# Altium PCB 400797.PcbDoc (part 6 of 8)
Units mm, origin at the board's own origin, x right, y up, seen from the top; angles counter-clockwise.
Board outline 155 x 63.5 mm, 4 copper layers (Top Layer, Mid-Layer 1, Mid-Layer 2, Bottom Layer), stack 1.514 mm thick; 333 components, 292 nets, 1555 pads, 2205 vias.
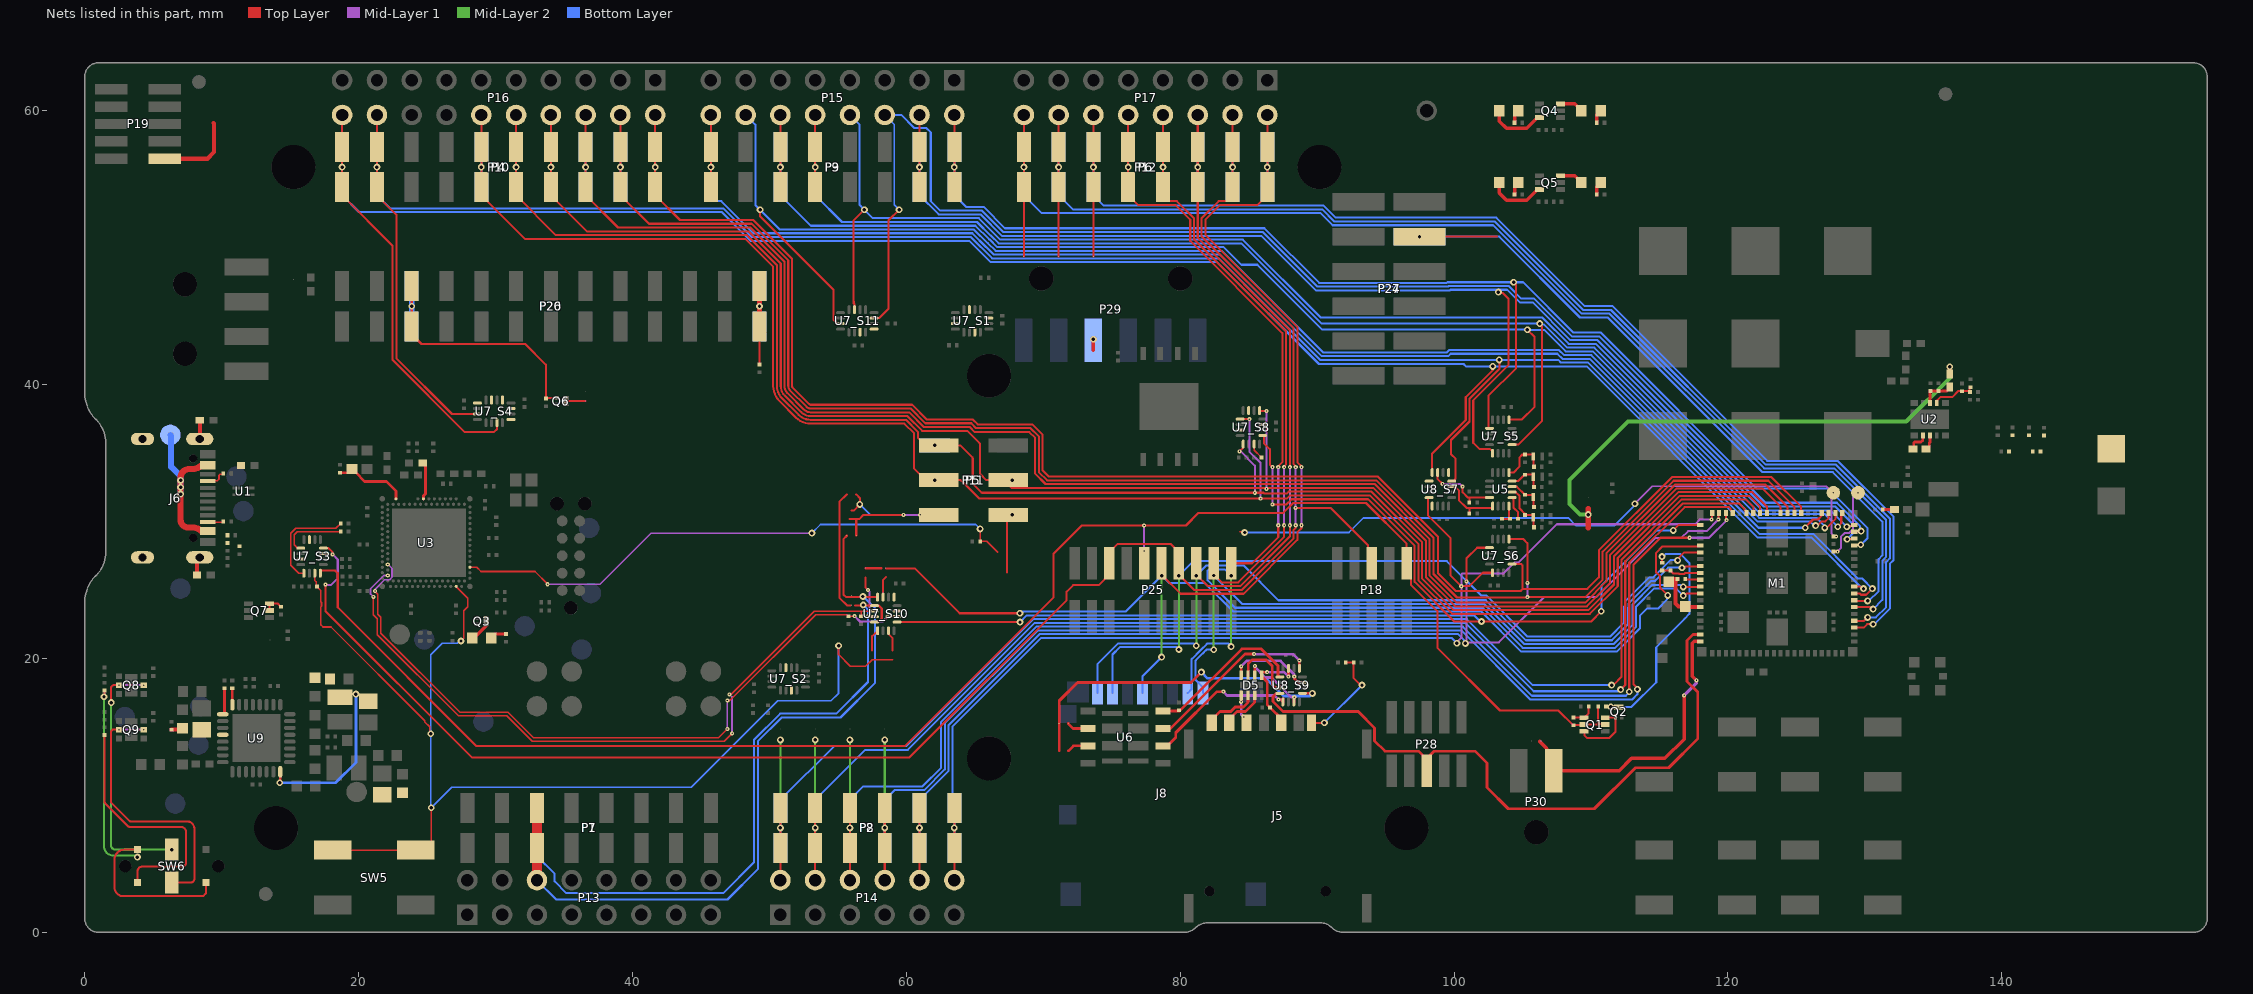
[diagram p6: the nets of this part, all layers, seen from the top]

## Via types
v1: diameter 0.5, hole 0.25, Top Layer to Bottom Layer, tented both sides, 1614 vias
v2: diameter 0.3, hole 0.1, Top Layer to Mid-Layer 1, tented top, 485 vias
v3: diameter 0.3, hole 0.1, Top Layer to Mid-Layer 1, tented both sides, 97 vias
v4: diameter 0.61, hole 0.305, Top Layer to Bottom Layer, tented both sides, 9 vias

## Nets (pads, with @x,y where several pads share a name; then routed paths per layer and width w, separated by ;. In a path a pad name is that pad's centre, name@x,y a point inside that pad or via, vN(x,y) a via of type N, cw(c..) or ccw(c..) an arc to the next point about the centre after c; other vN are vias at no path point) (continued)
NC.CH1_S9: C49.2 U6.8 U8_S9.1 | length 11.7
  Top Layer w0.2: U6.8@78.75,16.155 79.955,16.155 84.5,20.7 85.915,20.7 87.146,19.469 87.146,18.779 U8_S9.1@87.275,18.65
NC.CH2_S4: U7_S4.5
NC.CH2_S7: U8_S7.5
NC.CH2_S9: U6.6 U8_S9.5 | length 11.1
  Top Layer w0.2: U6.6@78.75,13.615 79.05,13.615 79.675,14.24 79.675,14.575 82.675,17.575 v2(83.15,17.575) ; v2(87.175,17) 87.325,17 U8_S9.5@87.5,16.825 U8_S9.5@87.5,17.05
  Mid-Layer 1 w0.2: v2(83.15,17.575) 83.425,17.3 86.875,17.3 v2(87.175,17)
NC.CH2_S10: SB21.1 U7_S10.5 | length 1.6
  Top Layer w0.15: SB21.1@57.5,20.588 SB21.1@57.5,20.6 57.5,21.625 U7_S10.5@57.9,22.025
NC.CH3_S3: R20.2 U7_S3.9 | length 4.8
  Top Layer w0.125: U7_S3.9@15.775,28.05 15.55,28.05 15.3,28.3 15.3,29.044 15.515,29.259 R20.2@18.69,29.259
NC.CH3_S4: U7_S4.9
NC.CH3_S7: U8_S7.9
NC.CH3_S9: SB13.2 SB14.2 U8_S9.9 | length 24.5
  Top Layer w0.2: SB14.2@71.162,13.25 71.162,16.912 72.5,18.25 80.8,18.25 v1(81.55,19) ; U8_S9.9@88.925,17.45 v1(89.65,17.45)
  Bottom Layer w0.2: v1(81.55,19) 82,18.55 86.25,18.55 87.55,17.25 89.45,17.25 v1(89.65,17.45)
NC.CH4_S3: R19.2 U7_S3.13 | length 7.5
  Top Layer w0.125: U7_S3.13@16,26.225 15.625,26.225 15.05,26.8 15.05,29.147 15.412,29.509 18.34,29.509 R19.2@18.69,29.859
NC.CH4_S4: U7_S4.13
NC.CH4_S7: U8_S7.13
NC.CH4_S9: U6.7 U8_S9.13 | length 13
  Top Layer w0.2: U6.7@78.75,14.885 79.285,14.885 84.725,20.325 v2(85.4,20.325) ; U8_S9.13@88.7,19.275 v2(88.7,19.85)
  Mid-Layer 1 w0.2: v2(85.4,20.325) 85.415,20.31 88.24,20.31 v2(88.7,19.85)
NC.CH4_S10: U7_S10.13
NC.CH4_S11: U7_S11.13
NetA1_1: A1.1 C20.2 L2.2
NetC7_1: C7.1 FB1.2 M1.14 R1.1 | length 4.5
  Top Layer w0.3: C7.1@115.675,25.6 115.875,25.8 R1.1@116.315,25.8 116.175,25.66 116.175,24.025 116.4,23.8 FB1.2@116.875,23.8 116.925,23.75 M1.14@117.975,23.75
NetC8_2: C8.2 C9.2 C50.2 FB2.1 J6.A4 J6.A9 TP17.1 U1.1 | length 12.5
  Top Layer w0.45: J6.A9@8.985,29.3 8.489,29.3 ccw(c7.915,28.81) 7.896,29.565 7.535,29.565 cw(c7.535,30.1) 7,30.1 v1(7,32) v1(7,32.5) v1(7,33) 7,33.2 cw(c7.635,33.2) 7.635,33.835 7.896,33.835 ccw(c7.915,34.59) 8.489,34.1 J6.A4@8.985,34.1
  Bottom Layer w0.45: TP17.1@6.248,36.324 6.3,36.272 6.3,34 7,33.3 v1(7,33) v1(7,32.5) v1(7,32)
NetC10_1: C10.1 M1.9 R2.2 | length 2.9
  Top Layer w0.15: R2.2@115.125,26.475 115.14,26.475 R2.2@115.2,26.415 C10.1@115.8,26.415 ; C10.1@115.875,26.34 116.015,26.2 116.411,26.2 116.434,26.177 116.83,26.177 116.903,26.25 M1.9@117.975,26.25
NetC14_2: C14.2 C15.2 FB3.1 U2.3 | length 2.5
  Top Layer w0.2: U2.3@134.747,38.653 C14.2@134.747,39.534 ; C14.2@134.797,39.534 C14.2@134.8,39.537 C15.2@135.375,39.537 135.987,39.537 136.2,39.75 FB3.1@136.2,39.825 FB3.1@136.2,39.9
NetC16_2: C16.2 C17.2 R6.2 U2.2 | length 3.1
  Top Layer w0.15: U2.2@135.247,38.653 135.247,38.819 135.513,39.085 136.385,39.085 136.837,39.537 137.595,39.537 137.625,39.567 137.625,39.755 137.685,39.815 C16.2@137.7,39.815
NetC19_2: C19.2 L4.2 | length 0.8
  Top Layer w0.203: C19.2@131.315,30.88 L4.2@132.155,30.88
NetC20_1: C20.1 C22.2 C23.2 L1.2
NetC36_2: C36.2 U3.A15 | length 2.7
  Top Layer w0.225: C36.2@24.675,34.264 24.875,34.064 24.875,32.009 24.725,31.859 U3.A15@24.725,31.659
NetC37_1: C37.1 R21.2 U3.A5 | length 5.3
  Top Layer w0.15: U3.A5@22.725,31.659 U3.A5@22.75,31.684
  Top Layer w0.18: U3.A5@22.745,31.684 22.745,31.774
  Top Layer w0.2: R21.2@18.625,33.565 19.794,33.565 20.434,32.925 22.026,32.925 22.725,32.225 U3.A5@22.725,31.659
NetC44_1: C44.1 D1.3 R53.1 U5.2 | length 3.6
  Top Layer w0.15: U5.2@104.235,32.15 104.516,32.15 104.78,31.887 104.78,30.963 105.174,30.568 C44.1@105.174,30.476 D1.3@105.784,30.476 ; D1.3@105.789,30.318 105.789,29.621 R53.1@105.829,29.581
NetC45_2: C45.2 D2.3 R55.1 U5.3 | length 2.6
  Top Layer w0.15: U5.3@104.235,32.55 104.581,32.55 C45.2@105.182,31.949 ; C45.2@105.174,31.949 C45.2@105.182,31.949 ; D2.3@105.784,31.949 C45.2@105.182,31.949 ; D2.3@105.789,31.791 105.789,31.095 R55.1@105.829,31.055
NetC46_2: C46.2 D3.3 R57.1 U5.4 | length 2.5
  Top Layer w0.15: U5.4@104.235,32.95 104.67,32.95 105.142,33.422 C46.2@105.174,33.422 D3.3@105.784,33.422 ; D3.3@105.789,33.264 105.789,32.568 R57.1@105.829,32.528
NetC47_2: C47.2 D4.3 R61.1 U5.5 | length 3.5
  Top Layer w0.15: U5.5@104.01,33.575 104.34,33.575 104.771,34.006 104.771,34.669 104.997,34.896 C47.2@105.174,34.896 D4.3@105.784,34.896 ; D4.3@105.789,34.738 105.789,34.041 R61.1@105.829,34.001
NetC57_2: C57.2 C67.2 FB4.1 U9.20 | length 0.9
  Top Layer w0.3: C67.2@6.327,14.797 7.027,14.797 ccw(c7.027,14.897) C57.2@7.127,14.897
NetC59_2: C59.2 C71.2 FB6.1 L8.1 U9.32 | length 12
  Top Layer w0.2: v1(14.234,10.924) 14.275,10.965 U9.32@14.275,11.725
  Bottom Layer w0.2: v1(14.234,10.924) 18.324,10.924 19.8,12.4 v1(19.8,17.4)
NetC61_1: C61.1 C63.1 J6.SHLD | length 2.7
  Top Layer w0.3: C63.1@8.2,26.1 8.2,27.185 J6.SHLD@8.395,27.38 ; J6.SHLD@8.395,36.03 8.4,36.035 C61.1@8.4,37.4
NetC70_2: C70.2 FB5.2 SB33.1
NetD5_1: D5.1 J5.C2 | length 1.7
  Top Layer w0.2: v2(84.45,16.825) D5.1@84.45,17.325
  Mid-Layer 1 w0.2: v2(84.45,16.825) 84.45,15.925 v2(84.65,15.725)
NetD5_2: D5.2 J5.C3 | length 3.9
  Top Layer w0.2: J5.C3@82.3,15.3 82.3,15.525 82.9,16.125 83.69,16.125 84.015,16.45 84.619,16.45 84.95,16.781 D5.2@84.95,17.325
NetD5_3: D5.3 J5.C7 | length 3.2
  Top Layer w0.2: J5.C7@83.57,15.3 83.57,15.545 84.15,16.125 84.753,16.125 85.45,16.822 D5.3@85.45,17.325
NetFB3_2: FB3.2 SB1.2 SB2.2 | length 37.1
  Top Layer w0.3: FB3.2@136.2,40.775 v1(136.2,41.3)
  Top Layer w0.4: SB1.2@109.8,29.55 v1(109.8,30.5) 109.8,30.95
  Mid-Layer 2 w0.3: v1(109.8,30.5) 109.2,30.5 108.425,31.275 108.425,33.025 112.7,37.3 133.02,37.3 136.2,40.48 v1(136.2,41.3)
NetJ5_CD: J5.CD R62.2 R63.2 | length 7.4
  Top Layer w0.15: J5.CD@89.6,15.3 v1(90.525,15.3) ; R63.2@92.085,19.7 R62.2@92.665,19.7 92.665,18.56 93.175,18.05 v1(93.275,18.05)
  Bottom Layer w0.15: v1(90.525,15.3) v1(93.275,18.05)
NetJ6_A5: J6.A5 R71.2 | length 1.5
  Top Layer w0.125: J6.A5@8.985,32.955 8.999,32.969 9.669,32.969 9.8,33.1 9.8,33.368 9.873,33.442 10.057,33.442 R71.2@10.115,33.5
NetJ6_B5: J6.B5 R70.2 | length 1.1
  Top Layer w0.125: J6.B5@8.985,29.955 10.07,29.955 R70.2@10.115,30
NetL6_1: L6.1 U2.8 | length 1.1
  Top Layer w0.2: L6.1@134.475,35.3 134.55,35.3 134.7,35.45 134.7,35.718 134.747,35.765 U2.8@134.747,36.278
NetL6_2: L6.2 U2.7 | length 1.5
  Top Layer w0.2: L6.2@133.525,35.3 133.575,35.35 133.575,35.733 133.642,35.8 134.1,35.8 134.225,35.925 134.225,36.256 U2.7@134.247,36.278
NetLED1_1: LED1.1 Q4.6 | length 4.1
  Top Layer w0.254: LED1.1@103.301,60 103.301,59.242 103.827,58.716 105.304,58.716 Q4.6@106.039,59.452 ; Q4.6@106.202,59.452 Q4.6@106.25,59.5
NetLED1_2: LED1.2 R39.1 | length 1
  Top Layer w0.254: R39.1@104.414,59.118 104.414,59.69 LED1.2@104.698,59.975
NetLED2_1: LED2.1 Q4.3 | length 1.8
  Top Layer w0.254: Q4.3@107.75,60.5 Q4.3@107.775,60.5 108.801,60.5 109.022,60.279 109.047,60.279 109.301,60.025 LED2.1@109.301,60
NetLED2_2: LED2.2 R40.1 | length 1
  Top Layer w0.254: R40.1@110.414,59.118 110.414,59.69 110.698,59.975 LED2.2@110.698,60
NetLED3_1: LED3.1 Q5.6 | length 4.1
  Top Layer w0.254: LED3.1@103.302,54.75 103.302,53.992 103.827,53.466 105.304,53.466 Q5.6@106.039,54.202 ; Q5.6@106.202,54.202 Q5.6@106.25,54.25
NetLED3_2: LED3.2 R41.1 | length 1
  Top Layer w0.254: R41.1@104.414,53.868 104.414,54.44 104.699,54.725 LED3.2@104.699,54.75
NetLED4_1: LED4.1 Q5.3 | length 1.4
  Top Layer w0.254: Q5.3@107.75,55.25 Q5.3@107.775,55.25 108.801,55.25 LED4.1@109.022,55.029
NetLED4_2: LED4.2 R42.1 | length 1
  Top Layer w0.254: R42.1@110.414,53.868 110.414,54.44 110.698,54.725 LED4.2@110.698,54.75
NetLED5_1: LED5.1 Q3.3 | length 1.7
  Top Layer w0.25: LED5.1@28.302,21.5 28.45,21.5 29.325,22.375 Q3.3@29.325,22.725
NetLED5_2: LED5.2 R33.1 | length 1.2
  Top Layer w0.25: LED5.2@29.699,21.5 29.983,21.785 R33.1@30.75,21.785
NetM1_10: M1.10 R1.2 | length 1.1
  Top Layer w0.15: R1.2@116.885,25.8 116.935,25.75 M1.10@117.975,25.75
NetM1_99: M1.99 TP1.1 | length 5.4
  Top Layer w0.15: M1.99@127.7,27.8 v3(128,27.8)
  Mid-Layer 1 w0.15: v3(128,27.8) 128.25,28.05 128.25,28.886 128.521,29.158 128.863,29.158 129.135,29.429 129.135,31.735 v3(129.5,32.1)
NetM1_101: M1.101 SB11.2 TP2.1 | length 49.2
  Top Layer w0.125: SB11.2@84.35,29.25 84.539,29.25 84.556,29.233 84.667,29.233 v1(84.7,29.2)
  Top Layer w0.15: M1.101@127.7,28.9 127.703,28.903 127.898,28.903 v3(127.901,28.905)
  Mid-Layer 1 w0.125: v1(113.2,31.3) 114.477,32.577 127.176,32.577 127.653,32.1 v3(127.7,32.1)
  Mid-Layer 1 w0.15: v3(127.7,32.1) 127.7,32.087 127.55,31.937 127.55,29.15 127.785,28.915 127.891,28.915 v3(127.901,28.905)
  Bottom Layer w0.125: v1(84.7,29.2) 92.319,29.2 93.381,30.263 108.337,30.263 108.9,29.7 111.7,29.7 113.2,31.2 v1(113.2,31.3)
NetP5_6: P5.6 P11.6 SB18.1 SB19.2 | length 4
  Top Layer w0.152: 67.338,26.275 P5.6@67.338,30.263
  other v1: 67.722,30.481
NetP19_1: P19.1 SB15.1 SB16.1 | length 5.9
  Top Layer w0.3: P19.1@5.836,56.491 8.95,56.491 9.438,56.978 9.438,57.603 9.438,59.057 SB16.1@9.4,59.095
NetP20_3: P20.3 P26.3 Q6.1 R67.1 | length 20.9
  Top Layer w0.15: P20.3@23.876,47.753 P20.3@23.876,47.186 v1(23.876,45.721) P20.3@23.876,44.256 23.876,43.674 24.589,42.961 32.164,42.961 33.675,41.45 R67.1@33.675,39.025 ; R67.1@33.675,38.985 R67.1@33.675,39.025 ; Q6.1@34.425,39.025 R67.1@33.675,39.025
  Bottom Layer w0.381: P26.3@23.876,44.256 v1(23.876,45.721) P26.3@23.876,47.186
NetP20_13: P20.13 P26.13 R68.2 | length 9.3
  Top Layer w0.152: R68.2@49.276,41.46 P20.13@49.276,44.256 49.276,44.204 P20.13@49.71,43.77
  Top Layer w0.381: P20.13@49.276,44.256 v1(49.276,45.721) P20.13@49.276,47.186
  Bottom Layer w0.381: P26.13@49.276,44.256 v1(49.276,45.721) P26.13@49.276,47.186
NetP29_3: P29.3 SB20.2 | length 0.8
  Top Layer w0.254: 73.66,42.517 SB20.2@73.66,42.555 v1(73.66,43.31)
NetQ1_3: Q1.3 Q1.6 Q2.1 | length 4.7
  Top Layer w0.15: Q1.6@109.49,14.675 109.537,14.628 109.537,14.363 109.7,14.2 111.348,14.2 111.79,14.642 Q2.1@111.79,15.725 ; Q1.3@111.04,15.675 111.74,15.675 Q2.1@111.79,15.725 ; Q2.1@111.79,15.75 Q2.1@111.79,15.725
NetQ1_4: Q1.4 R8.2 R10.2 | length 1.7
  Top Layer w0.15: R10.2@108.715,15.685 109.5,15.685 109.825,16.01 R8.2@109.825,16.5
NetQ6_3: Q6.3 SB17.1 | length 1.5
  Top Layer w0.15: Q6.3@35.125,38.8 35.135,38.81 SB17.1@36.576,38.81
NetQ7_5: Q7.5 Q7.6 R75.2 | length 1.4
  Top Layer w0.15: Q7.5@13.5,23.5 Q7.6@13.5,24 14.11,24 R75.2@14.325,23.785
NetQ8_2: Q8.2 Q8.5 SW6.5 | length 18.6
  Top Layer w0.15: v1(1.936,16.778) 1.9,16.814 1.9,17.8 cw(c2.15,17.8) 2.15,18.05 v2(2.495,18.05)
  Mid-Layer 1 w0.15: v2(2.495,18.05) v2(4.305,18.05)
  Mid-Layer 2 w0.15: v1(1.936,16.778) 1.9,16.743 1.9,6.389 ccw(c2.254,6.389) 2.254,6.035 v1(6.35,6.035)
NetQ9_2: Q9.2 Q9.5 SW6.2 | length 20.1
  Top Layer w0.15: v2(2.495,14.8) 2.1,14.8 ccw(c2.1,14.6) 1.9,14.6 1.9,9.562 ccw(c2.05,9.562) 1.944,9.456 3.256,8.144 ccw(c3.362,8.25) 3.362,8.1 7.46,8.1 cw(c7.46,7.56) 8,7.56 8,3.9 cw(c7.735,3.9) 7.735,3.635 SW6.2@6.35,3.635
  Mid-Layer 1 w0.15: v2(2.495,14.8) v2(4.305,14.8)
NetR36_1: R36.1 U9.17 | length 2
  Top Layer w0.2: U9.17@10.075,15.925 ccw(c10.075,16.05) 10.2,16.05 R36.1@10.2,17.815
NetR37_1: R37.1 U9.16 | length 1.2
  Top Layer w0.2: R37.1@10.769,17.822 10.769,16.625 U9.16@10.775,16.625
NetR51_1: R51.1 U5.1 | length 1.7
  Top Layer w0.15: U5.1@104.235,31.75 104.34,31.645 104.34,31.014 104.68,30.674 R51.1@104.68,30.197
NetR58_1: R58.1 R59.2 U5.16 | length 1.5
  Top Layer w0.15: R59.2@103.511,30.197 R58.1@104.095,30.197 104.01,30.282 U5.16@104.01,31.125
NetR77_2: R77.2 SW6.3 SW6.4 | length 26.3
  Top Layer w0.15: v1(1.4,17.2) 1.425,17.225 1.425,17.64 R77.2@1.45,17.665 ; SW6.4@3.85,6.035 2.901,6.035 ccw(c2.901,5.309) 2.175,5.309 2.175,3.279 ccw(c2.819,3.279) 2.819,2.635 8.573,2.635 ccw(c8.573,2.785) 8.679,2.679 8.806,2.806 ccw(c8.7,2.912) 8.85,2.912 SW6.3@8.85,3.635
  Mid-Layer 2 w0.15: v1(1.4,17.2) 1.4,6.3 ccw(c2.1,6.3) 2.1,5.6 3.735,5.6 cw(c3.735,5.495) v1(3.84,5.495)
NetR79_1: R79.1 SW6.1 | length 18.8
  Top Layer w0.15: R79.1@1.45,14.415 1.45,9.512 ccw(c1.6,9.512) 1.494,9.406 3.156,7.744 ccw(c3.262,7.85) 3.262,7.7 7.011,7.7 cw(c7.011,7.311) 7.4,7.311 7.4,5.1 cw(c7.1,5.1) 7.1,4.8 4.2,4.8 ccw(c4.2,4.45) 3.85,4.45 SW6.1@3.85,3.635
NetSB13_1: SB13.1 U6.2 | length 1.6
  Top Layer w0.2: 71.812,15.25 72.177,14.885 U6.2@73.25,14.885
NetSB14_1: SB14.1 U6.3 | length 1.6
  Top Layer w0.2: SB14.1@71.838,13.25 72.203,13.615 U6.3@73.25,13.615
NO.CH1_S1: U7_S1.15
NO.CH1_S8: R35.1 U7_S8.15 | length 1.2
  Top Layer w0.125: U7_S8.15@85.4,35.65 85.4,35.209 R35.1@85.938,34.671
NO.CH1_S9: C48.1 D5.5 J5.C1 U8_S9.15 | length 6.8
  Top Layer w0.2: D5.5@85.95,18.775 85.95,18.7 86.35,18.3 86.35,16.635 C48.1@86.56,16.425 87.38,15.605 J5.C1@87.38,15.3 ; D5.5@85.95,19 v2(86.35,19) ; v2(87.9,18.675) U8_S9.15@87.9,19.275
  Mid-Layer 1 w0.2: v2(86.35,19) 87.575,19 v2(87.9,18.675)
NO.CH1_S10: SB22.2 U7_S10.15 | length 1.5
  Top Layer w0.15: U7_S10.15@58.3,24.475 58.3,25.738 58.5,25.938
NO.CH2_S1: U7_S1.3
NO.CH2_S2: U7_S2.3
NO.CH2_S3: U7_S3.3
NO.CH2_S8: U7_S8.3
NO.CH2_S9: D5.7 U8_S9.3 | length 4.9
  Top Layer w0.2: D5.7@84.95,18.775 84.975,18.8 84.975,19.625 85.25,19.9 86.255,19.9 86.725,19.43 86.725,18.111 86.986,17.85 U8_S9.3@87.275,17.85
NO.CH2_S10: SB23.2 U7_S10.3 | length 3.6
  Top Layer w0.15: SB23.2@57,25.912 SB23.2@57,25.9 57,25.2 v2(57.2,25) ; v2(57.15,23.05) U7_S10.3@57.675,23.05
  Mid-Layer 1 w0.15: v2(57.15,23.05) 57.3,23.2 57.3,24.9 v2(57.2,25)
NO.CH3_S1: U7_S1.7
NO.CH3_S3: U7_S3.7
NO.CH3_S4: U7_S4.7
NO.CH3_S8: U7_S8.7
NO.CH3_S9: D5.6 U8_S9.7 | length 4.9
  Top Layer w0.2: D5.6@85.45,18.775 v2(85.45,19.45) ; U8_S9.7@88.3,16.825 88.3,17.15 v2(88.325,17.175)
  Mid-Layer 1 w0.2: v2(85.45,19.45) 85.45,19.37 86.204,18.616 86.659,18.616 88.1,17.175 v2(88.325,17.175)
NO.CH3_S10: SB24.1 U7_S10.7 | length 1.6
  Top Layer w0.15: U7_S10.7@58.7,22.025 58.7,21.772 59,21.472 SB24.1@59,20.6 SB24.1@59,20.588
NO.CH4_S1: U7_S1.11
NO.CH4_S2: U7_S2.11
NO.CH4_S3: U7_S3.11
NO.CH4_S4: U7_S4.11
NO.CH4_S8: U7_S8.11
NO.CH4_S9: D5.8 U8_S9.11 | length 6.1
  Top Layer w0.2: D5.8@84.45,18.775 v2(84.45,19.425) ; v2(88.325,18.675) 88.325,18.55 88.625,18.25 U8_S9.11@88.925,18.25
  Mid-Layer 1 w0.2: v2(84.45,19.425) 84.85,19.825 87.315,19.825 88.325,18.815 v2(88.325,18.675)
NO.CH4_S10: U7_S10.11
NO.CH4_S11: U7_S11.11
nRESET: Q2.3 R2.1 R9.2 | length 17.6
  Top Layer w0.15: R9.2@111.1,16.5 v1@111.398,16.5 ; v1(111.44,16.459) v1@111.398,16.5 ; Q2.3@112.015,16.45 111.965,16.5 v1@111.398,16.5 ; v1(115.181,27.438) 115.191,27.429 115.191,26.994 R2.1@115.2,26.985
  Bottom Layer w0.15: v1(111.44,16.459) 112.959,16.459 114.762,18.262 114.762,20.812 116.837,22.887 116.837,22.905 117.188,23.255 117.188,26.973 116.548,27.613 115.444,27.613 115.269,27.438 v1(115.181,27.438)
P0.00: M1.56 P3.1 P9.1 P15.2 U7_S5.1 | length 99.1
  Top Layer w0.15: P3.1@63.5,54.416 v1(63.5,55.881) P3.1@63.5,57.346 P15.2@63.5,59.691 ; U7_S5.1@102.585,36.809 102.5,36.894 102.5,39.172 104.535,41.207 104.535,47.29 v1(104.35,47.475) ; M1.56@129.225,28.25 129.375,28.275 129.604,28.275 ccw(c129.603,28.425) v1(129.694,28.306)
  Bottom Layer w0.15: P9.1@63.5,57.346 v1(63.5,55.881) P9.1@63.5,54.416 63.5,53.831 64.356,52.975 65.639,52.975 67.198,51.416 86.148,51.416 90.138,47.426 99.46,47.426 99.509,47.475 v1(104.35,47.475) 105.041,47.475 108.715,43.8 110.7,43.8 122.1,32.4 127.314,32.4 130.175,29.539 130.175,28.775 130.089,28.689 129.734,28.334 cw(c129.628,28.44) v1(129.694,28.306)
P0.01: M1.57 P3.2 P9.2 P15.4 U7_S5.5 | length 103.3
  Top Layer w0.15: P3.2@60.96,54.416 v1(60.96,55.881) P3.2@60.96,57.346 P15.4@60.96,59.691 ; U7_S5.5@102.81,34.984 102.81,35.099 102.61,35.299 101.851,35.299 101.4,35.75 101.4,38.85 103.985,41.435 103.985,46.249 103.545,46.689 103.296,46.689 v1(103.235,46.75) ; v1(128.7,28.7) 128.725,28.725 129.2,28.725 M1.57@129.225,28.75
  Bottom Layer w0.15: P9.2@60.96,57.346 v1(60.96,55.881) P9.2@60.96,54.416 60.96,53.831 62.366,52.425 65.411,52.425 66.97,50.866 85.92,50.866 89.91,46.876 99.688,46.876 99.737,46.925 v1@103.235,46.925 ; v1(103.235,46.75) v1@103.235,46.925 ; v1(128.7,28.7) 129.135,29.135 129.135,29.802 127.842,31.094 122.628,31.094 110.472,43.25 108.488,43.25 105.738,46 104.799,46 103.874,46.925 v1@103.235,46.925
P0.02: M1.58 P15.6 U7_S11.15 | length 103.8
  Top Layer w0.15: U7_S11.15@57.643,44.85 58,44.85 58.695,45.545 58.695,51.992 v1(59.473,52.77) ; M1.58@129.225,29.25 129.25,29.275 129.7,29.275 v1(129.725,29.3)
  Bottom Layer w0.125: P15.6@58.42,59.691 58.518,59.593 59.118,58.993 59.118,53.126 v1(59.473,52.77)
  Bottom Layer w0.15: P15.6@58.518,59.593 58.616,59.691 59.616,59.691 60.566,58.741 61.453,58.741 61.78,58.414 61.78,53.4 62.48,52.7 65.525,52.7 67.084,51.141 86.034,51.141 90.024,47.151 99.574,47.151 99.623,47.2 103.988,47.2 104.913,46.275 105.852,46.275 108.602,43.525 110.586,43.525 122.742,31.369 127.956,31.369 129.658,29.667 129.658,29.367 v1(129.725,29.3)
P0.03: M1.59 P15.8 U7_S11.3 | length 97
  Top Layer w0.15: U7_S11.3@56.218,45.475 56.218,45.875 56.156,45.938 56.156,46.051 56.155,51.992 v1(56.933,52.77) ; v1(128.685,29.615) 128.752,29.682 129.157,29.682 M1.59@129.225,29.75
  Bottom Layer w0.15: P15.8@55.88,59.691 56.59,58.981 56.59,53.114 v1(56.933,52.77) 57.554,52.15 65.297,52.15 66.856,50.591 84.573,50.591 90.278,44.886 100.072,44.886 100.086,44.9 106.449,44.9 108.374,42.975 110.358,42.975 122.514,30.819 127.481,30.819 v1(128.685,29.615)
P0.04: M1.61 P3.5 P9.5 P15.10 U7_S5.9 | length 104.7
  Top Layer w0.15: P3.5@53.34,54.416 P3.5@53.34,57.346 P15.10@53.34,59.691 ; U7_S5.9@104.235,35.609 104.693,35.609 106.429,37.344 106.429,44.274 v1(106.252,44.45) ; v1(128.015,29.615) 128.015,29.618 128.275,29.878 128.275,30.55 M1.61@128.35,30.625
  Bottom Layer w0.15: P9.5@53.34,57.346 v1(53.34,55.881) P9.5@53.34,54.416 53.34,53.831 55.296,51.875 65.158,51.875 66.158,50.875 66.183,50.875 66.742,50.316 84.459,50.316 90.325,44.45 v1(106.252,44.45) 106.319,44.383 106.577,44.383 108.26,42.7 110.245,42.7 122.4,30.544 127.086,30.544 v1(128.015,29.615)
P0.05: M1.62 P3.6 P9.6 P15.12 U7_S5.13 | length 104.8
  Top Layer w0.15: P3.6@50.8,54.416 P3.6@50.8,57.346 P15.12@50.8,59.691 ; U7_S5.13@104.01,37.434 104.92,37.434 105.879,38.393 105.879,43.471 v1(105.35,44) ; v1(127.071,29.536) 127.138,29.603 127.278,29.603 127.85,30.175 M1.62@127.85,30.625
  Bottom Layer w0.15: P9.6@50.8,57.346 v1(50.8,55.881) P9.6@50.8,54.416 50.8,53.831 53.031,51.6 65.044,51.6 66.044,50.6 66.069,50.6 66.628,50.041 83.173,50.041 84.464,48.75 85.636,48.75 90.37,44.016 105.334,44.016 v1(105.35,44) 106.571,44 108.146,42.425 110.131,42.425 122.286,30.269 126.467,30.269 127.004,29.732 127.004,29.603 v1(127.071,29.536)
P0.06: M1.63 P15.14 U7_S11.7 | length 106.6
  Top Layer w0.15: v1(49.313,52.77) 49.313,52.298 54.668,46.943 54.668,44.722 54.94,44.45 U7_S11.7@55.193,44.45 ; v1(126.4,29.7) 126.519,29.7 126.572,29.753 126.606,29.753 126.862,30.008 127.108,30.008 127.35,30.25 M1.63@127.35,30.625
  Bottom Layer w0.15: P15.14@48.26,59.691 48.97,58.981 48.97,53.114 v1(49.313,52.77) 50.759,51.325 64.93,51.325 65.93,50.325 65.955,50.325 66.514,49.766 83.034,49.766 90.454,42.346 99.46,42.346 99.639,42.525 107.657,42.525 108.032,42.15 110.017,42.15 122.172,29.994 126.023,29.994 126.317,29.7 v1(126.4,29.7)
P0.07: M1.64 P3.8 P9.8 P15.16 | length 100.7
  Top Layer w0.15: P3.8@45.72,54.416 P3.8@45.72,57.346 P15.16@45.72,59.691 ; v1(125.648,29.544) 125.648,29.584 126.214,30.15 126.573,30.15 126.85,30.427 M1.64@126.85,30.625
  Bottom Layer w0.15: P9.8@45.72,57.346 v1(45.72,55.881) P9.8@45.72,54.416 45.72,53.831 46.155,53.396 46.486,53.396 48.832,51.05 64.817,51.05 65.817,50.05 65.841,50.05 66.4,49.491 82.92,49.491 90.34,42.071 99.574,42.071 99.753,42.25 107.543,42.25 107.918,41.875 109.903,41.875 122.233,29.544 v1(125.648,29.544)
P0.08: M1.67 P4.1 P10.1 P16.2 U7_S6.1 | length 121.5
  Top Layer w0.15: P16.2@41.656,59.691 P4.1@41.656,57.346 v1(41.656,55.881) P4.1@41.656,54.416 41.656,53.831 43.468,52.019 48.814,52.019 51.65,49.183 51.65,39.887 ccw(c51.8,39.887) 51.694,39.781 52.906,38.569 ccw(c53.012,38.675) 53.012,38.525 60.425,38.525 61.5,37.45 64.85,37.45 65.2,37.1 69.181,37.1 69.95,36.331 69.95,33.725 70.389,33.286 94.423,33.286 98.825,28.884 98.825,26.225 100.125,24.925 104.851,24.925 105.005,25.079 ; U7_S6.1@104.235,26.884 104.909,26.884 104.997,26.796 104.997,25.088 105.005,25.079 ; M1.67@125.35,30.625 125.35,31.075 123.175,33.25 115.92,33.25 110.575,27.905 110.575,25.93 109.724,25.079 105.005,25.079
  Bottom Layer w0.15: P10.1@41.656,54.416 v1(41.656,55.881) P10.1@41.656,57.346
P0.09: M1.68 P4.2 P10.2 P16.4 U7_S6.5 | length 126.6
  Top Layer w0.15: P16.4@39.116,59.691 P4.2@39.116,57.346 v1(39.116,55.881) P4.2@39.116,54.416 39.116,53.831 41.203,51.744 48.7,51.744 51.375,49.07 51.375,39.887 ccw(c51.8,39.887) 51.498,39.588 52.713,38.373 ccw(c53.012,38.675) 53.012,38.25 60.311,38.25 61.386,37.175 64.736,37.175 65.086,36.825 69.067,36.825 69.675,36.217 69.675,33.611 70.275,33.011 94.309,33.011 98.495,28.825 98.495,26.166 100.211,24.45 105.287,24.45 105.312,24.475 v2(105.35,24.475) 109.584,24.475 110.85,25.741 110.85,27.791 116.034,32.975 122.95,32.975 124.85,31.075 M1.68@124.85,30.625 ; U7_S6.5@104.01,28.709 105.066,28.709 105.354,28.421 v2(105.354,25.521)
  Mid-Layer 1 w0.15: v2(105.35,24.475) 105.352,24.477 105.352,25.518 v2(105.354,25.521)
  Bottom Layer w0.15: P10.2@39.116,54.416 v1(39.116,55.881) P10.2@39.116,57.346
P0.10: M1.69 P4.3 P10.3 P16.6 | length 123.3
  Top Layer w0.15: P16.6@36.576,59.691 P4.3@36.576,57.346 v1(36.576,55.881) P4.3@36.576,54.416 36.576,53.831 38.938,51.469 48.586,51.469 51.1,48.956 51.1,39.887 ccw(c51.8,39.887) 51.302,39.395 52.52,38.178 ccw(c53.012,38.675) 53.012,37.975 60.197,37.975 61.272,36.9 64.622,36.9 64.997,36.525 68.978,36.525 69.4,36.103 69.4,33.497 70.161,32.736 94.196,32.736 98.22,28.712 98.22,26.052 100.197,24.075 109.573,24.075 111.125,25.627 111.125,27.677 116.148,32.7 122.725,32.7 124.35,31.075 M1.69@124.35,30.625
  Bottom Layer w0.15: P10.3@36.576,54.416 v1(36.576,55.881) P10.3@36.576,57.346
P0.11: M1.70 P4.4 P5.4 P10.4 P11.4 P16.8 U7_S8.5 | length 131.5
  Top Layer w0.15: P16.8@34.036,59.691 P4.4@34.036,57.346 v1(34.036,55.881) P4.4@34.036,54.416 34.036,53.824 36.665,51.194 39.881,51.194 39.882,51.193 40.483,51.193 40.485,51.194 48.473,51.194 50.825,48.842 50.825,39.887 ccw(c51.8,39.887) 51.108,39.2 52.325,37.983 ccw(c53.012,38.675) 53.012,37.7 60.083,37.7 61.158,36.625 64.45,36.625 65.331,35.744 cw(c65.225,35.638) 65.375,35.638 65.375,33.537 ccw(c65.525,33.537) 65.418,33.432 ; 65.419,33.431 65.829,33.021 P5.4@67.12,33.021 ; P5.4@67.437,33.021 P5.4@67.12,33.021 ; U7_S8.5@85.8,38.1 85.825,38.075 v2(86.3,38.075) ; v2(86.3,32.386) 86.269,32.417 ccw(c86.163,32.311) 86.163,32.461 67.679,32.461 P5.4@67.12,33.021 ; v2@86.416,32.461 94.082,32.461 97.945,28.598 97.945,25.938 100.083,23.8 109.687,23.8 111.4,25.513 111.4,27.563 116.262,32.425 122.5,32.425 123.85,31.075 M1.70@123.85,30.625
  Mid-Layer 1 w0.15: v2(86.3,32.386) v2(86.3,38.075)
  Bottom Layer w0.15: P10.4@34.036,54.416 v1(34.036,55.881) P10.4@34.036,57.346
  other v1: 67.722,33.021
P0.12: M1.72 P4.5 P5.1 P10.5 P11.1 P16.10 U7_S8.13 | length 130.9
  Top Layer w0.15: P16.10@31.496,59.691 P4.5@31.496,57.346 v1(31.496,55.881) P4.5@31.496,54.416 31.496,53.831 34.408,50.919 39.767,50.919 39.769,50.918 40.597,50.918 40.599,50.919 48.359,50.919 50.55,48.728 50.55,39.887 ccw(c51.8,39.887) 50.914,39.006 52.13,37.789 ccw(c53.012,38.675) 53.012,37.425 59.969,37.425 60.845,36.55 60.845,36.121 61.405,35.561 v1(62.072,35.561) P5.1@62.357,35.561 63.945,35.561 64.803,34.703 cw(c64.697,34.597) 64.847,34.597 64.847,33.672 64.847,32.815 ccw(c64.997,32.815) 64.89,32.71 65.456,32.144 ccw(c65.562,32.25) 65.562,32.1 v2(85.45,32.1) ; v2(84.325,35.125) 84.6,35.4 U7_S8.13@84.6,35.65 ; v2@85.47,32.08 85.491,32.1 86.091,32.1 86.155,32.036 87.761,32.036 87.911,32.186 93.968,32.186 97.67,28.484 97.67,25.824 99.969,23.525 109.801,23.525 111.675,25.399 111.675,27.449 116.376,32.15 119.538,32.15 120.538,32.15 120.541,32.148 121.777,32.148 122.85,31.075 M1.72@122.85,30.625
  Mid-Layer 1 w0.15: v2(84.325,35.125) 84.411,35.125 85.45,34.086 v2(85.45,32.1)
  Bottom Layer w0.15: P10.5@31.496,54.416 v1(31.496,55.881) P10.5@31.496,57.346
P0.13/AIN0: M1.73 P4.6 P5.3 P10.6 P11.3 P16.12 U7_S8.9 | length 135.8
  Top Layer w0.15: P16.12@28.956,59.691 P4.6@28.956,57.346 v1(28.956,55.881) P4.6@28.956,54.416 28.956,53.831 32.143,50.644 39.653,50.644 39.655,50.643 40.711,50.643 40.713,50.644 48.245,50.644 50.275,48.614 50.275,39.887 ccw(c51.8,39.887) 50.72,38.811 51.936,37.595 ccw(c53.012,38.675) 53.012,37.15 59.855,37.15 60.569,36.436 60.569,33.856 61.405,33.021 P5.3@62.357,33.021 63.917,33.021 cw(c63.917,32.871) 64.023,32.977 65.281,31.719 ccw(c65.387,31.825) 65.387,31.675 v2(85.875,31.675) ; U7_S8.9@84.375,37.475 v2(85.05,37.475) ; v2@85.944,31.675 87.789,31.675 88.025,31.911 93.854,31.911 97.395,28.37 97.395,25.71 99.855,23.25 109.915,23.25 111.95,25.285 111.95,27.335 116.49,31.875 119.425,31.875 120.425,31.875 120.427,31.873 121.552,31.873 122.35,31.075 M1.73@122.35,30.625
  Mid-Layer 1 w0.15: v2(85.05,37.475) 85.05,35.1 85.875,34.275 v2(85.875,31.675)
  Bottom Layer w0.15: P10.6@28.956,54.416 v1(28.956,55.881) P10.6@28.956,57.346
  other v1: 62.072,33.021
P0.14/AIN1: M1.74 P2.1 P8.1 P14.2 SB5.1 | length 105
  Top Layer w0.15: P14.2@50.8,3.811 P2.1@50.8,6.156 v1(50.8,7.621) P2.1@50.8,9.086 ; v1(111.5,18.055) 111.567,18.122 111.692,18.122 112.225,18.655 112.225,27.221 116.604,31.6 119.311,31.6 120.311,31.6 120.313,31.598 121.327,31.598 121.85,31.075 M1.74@121.85,30.625
  Mid-Layer 2 w0.15: v1(50.8,7.621) v1(50.8,14.05)
  Bottom Layer w0.15: P8.1@50.8,6.156 v1(50.8,7.621) P8.1@50.8,9.086 50.8,9.671 54.729,13.6 59.994,13.6 69.269,22.875 100.925,22.875 105.745,18.055 v1(111.5,18.055)
P0.15/AIN2: M1.75 P2.2 P8.2 P14.4 SB6.1 | length 102
  Top Layer w0.15: P14.4@53.34,3.811 P2.2@53.34,9.086 ; v1@112.165,17.726 112.5,18.062 112.5,27.107 116.718,31.325 119.197,31.325 120.197,31.325 120.199,31.323 120.81,31.323 121.2,30.933 121.2,30.85 121.35,30.7 M1.75@121.35,30.625
  Mid-Layer 2 w0.15: v1(53.34,7.621) v1(53.34,14.05)
  Bottom Layer w0.15: P8.2@53.34,6.156 v1(53.34,7.621) P8.2@53.34,9.086 53.34,9.671 56.994,13.325 60.108,13.325 69.383,22.6 100.811,22.6 105.806,17.605 111.95,17.605 112.07,17.725 v1(112.165,17.725)
P0.16/AIN3: M1.77 P2.3 P8.3 P14.6 SB9.1 | length 100.5
  Top Layer w0.15: P14.6@55.88,3.811 P2.3@55.88,6.156 v1(55.88,7.621) P2.3@55.88,9.086 ; v1(112.792,17.569) 112.792,27.01 116.832,31.05 119.083,31.05 120.083,31.05 120.2,30.933 120.2,30.85 120.35,30.7 M1.77@120.35,30.625
  Mid-Layer 2 w0.15: v1(55.88,7.621) v1(55.88,14.05)
  Bottom Layer w0.15: P8.3@55.88,6.156 v1(55.88,7.621) P8.3@55.88,9.086 55.88,9.671 56.865,10.656 61.178,10.656 62.539,12.017 62.539,15.367 69.497,22.325 100.632,22.325 105.682,17.275 112.538,17.275 112.792,17.529 v1(112.792,17.569)
P0.17/AIN4: M1.78 P2.4 P8.4 P14.8 SB10.1 | length 97.8
  Top Layer w0.15: P14.8@58.42,3.811 P2.4@58.42,6.156 v1(58.42,7.621) P2.4@58.42,9.086 ; v1(113.39,17.748) 113.39,17.839 113.1,18.129 113.1,26.84 115.072,28.813 v3(117.2,28.813) ; M1.78@119.85,30.625 119.85,30.191 119.9,30.141 v3(119.9,30.1)
  Mid-Layer 1 w0.15: v3(117.2,28.813) 118.613,28.813 v3(119.9,30.1)
  Mid-Layer 2 w0.15: v1(58.42,7.621) v1(58.42,14.05)
  Bottom Layer w0.15: P8.4@58.42,6.156 v1(58.42,7.621) P8.4@58.42,9.086 58.42,9.671 59.13,10.381 61.292,10.381 62.814,11.903 62.814,15.253 69.611,22.05 100.518,22.05 105.568,17 113,17 113.383,17.383 113.383,17.741 v1(113.39,17.748)
P0.18/AIN5: M1.79 P2.5 P8.5 P14.10 U7_S6.9 | length 86.8
  Top Layer w0.15: P14.10@60.96,3.811 P2.5@60.96,6.156 v1(60.96,7.621) P2.5@60.96,9.086 ; v2(100.9,25.625) 100.9,27.3 101.684,28.084 U7_S6.9@102.585,28.084 ; v3(119.3,30.15) 119.325,30.175 119.325,30.6 M1.79@119.35,30.625
  Mid-Layer 1 w0.15: v1(100.828,21.103) v1@100.9,21.175 ; v2(100.9,25.625) v1@100.9,21.175 ; v3(119.3,30.15) 118.45,29.3 117.1,29.3 116.6,28.8 114.711,28.8 110.411,24.5 106.6,24.5 103.275,21.175 v1@100.9,21.175
  Bottom Layer w0.15: P8.5@60.96,6.156 v1(60.96,7.621) P8.5@60.96,9.086 60.96,9.671 61.395,10.106 61.406,10.106 63.089,11.789 63.089,15.139 69.725,21.775 100.3,21.775 100.714,21.361 100.714,21.312 100.828,21.198 v1(100.828,21.103)
P0.19/AIN6: M1.80 P2.6 P8.6 P14.12 U7_S6.13 U8_S7.12 | length 89.7
  Top Layer w0.15: P14.12@63.5,3.811 P2.6@63.5,6.156 v1(63.5,7.621) P2.6@63.5,9.086 ; U8_S7.12@98.175,31.75 98.122,31.75 98.09,31.718 98.09,30.446 99.725,28.811 99.725,26.075 v2(100.525,25.275) 101.114,25.275 102.098,26.259 U7_S6.13@102.81,26.259 ; v3(118.8,30.15) 118.825,30.175 118.825,30.6 M1.80@118.85,30.625
  Mid-Layer 1 w0.15: v1(100.2,21.113) 100.2,21.175 100.525,21.5 v2(100.525,25.275) 100.525,26.112 100.613,26.2 103.6,26.2 104.4,27 104.7,27 107.5,29.8 117.6,29.8 117.95,30.15 v3(118.8,30.15)
  Bottom Layer w0.15: P8.6@63.5,6.156 v1(63.5,7.621) P8.6@63.5,9.086 63.364,9.222 63.364,15.025 69.839,21.5 99.812,21.5 v1(100.2,21.113)
P0.20/AIN7: M1.2 U7_S8.1 U7_S10.9 | length 89
  Top Layer w0.15: U7_S10.9@59.325,22.65 v1(68.3,22.65) ; U7_S8.1@86.025,36.275 86.11,36.19 86.11,35.729 86.548,35.291 86.548,34.155 v2(86.734,33.969) ; v2(86.725,31.25) 87.761,31.25 88.136,31.625 93.728,31.625 97.12,28.233 97.12,25.597 100.017,22.7 v1(102,22.7) 110.003,22.7 v1(110.751,23.449) ; v1(116,29.35) 116.4,29.75 M1.2@117.975,29.75
  Mid-Layer 1 w0.15: v2(86.725,31.25) 86.729,31.254 86.729,33.965 v2@86.725,33.969
  Bottom Layer w0.15: v1(68.3,22.65) 68.8,23.15 101.455,23.15 101.905,22.7 v1(102,22.7) ; v1(110.751,23.449) 110.751,25.294 114.808,29.35 v1(116,29.35)
P0.21: J8.5 M1.5 P6.1 P12.1 P17.2 P25.12 SB22.1 SB23.1 | length 134.2
  Top Layer w0.15: SB23.1@57,26.588 58.168,26.588 ; 58.5,26.562 58.5,26.575 60.018,26.575 60.031,26.562 60.638,26.562 63.9,23.3 v1(68.292,23.3) ; P25.12@78.667,26.083 80.025,24.725 84.625,24.725 88.559,28.659 88.559,29.209 88.853,29.503 88.853,29.722 v2(88.859,29.728) ; P17.2@86.36,59.691 P6.1@86.36,57.346 P6.1@86.36,54.416 86.36,53.831 85.65,53.121 82.914,53.121 81.83,52.037 81.83,50.945 88.559,44.216 88.559,34.339 88.859,34.039 v2(88.859,33.969) ; v1@115.505,24.6 v1(115.6,24.6) 115.05,25.15 115.05,25.997 114.731,26.316 114.731,27.694 115.213,28.175 117.9,28.175 M1.5@117.975,28.25
  Mid-Layer 1 w0.15: v2(88.859,29.728) v2(88.859,33.969)
  Mid-Layer 2 w0.15: v1(78.635,20.1) v1(78.635,26.05)
  Bottom Layer w0.15: v1(68.292,23.3) 68.387,23.3 68.512,23.425 76.01,23.425 v1(78.635,26.05) 79.185,25.5 81.8,25.5 83.875,23.425 101.975,23.425 104.897,20.503 111.881,20.503 113.566,22.188 113.566,23.127 114.082,23.643 114.893,23.643 115.539,24.289 115.539,24.539 v1(115.6,24.6) ; J8.5@77.25,17.47 77.25,18.715 v1(78.635,20.1) ; P12.1@86.36,54.416 P12.1@86.36,57.346
  other v1: 86.36,55.881
P0.22: J8.7 M1.6 P6.2 P12.2 P17.4 P18.6 P25.6 P25.14 U7_S3.4 | length 195.1
  Top Layer w0.15: U7_S3.4@17.425,28.05 17.8,28.05 18.1,27.75 v2(18.1,27.6) ; v2(17.575,25.4) 17.575,23.463 28.263,12.775 60.228,12.775 71.7,24.247 71.7,24.87 72.178,25.347 74.042,25.347 74.825,26.13 P25.6@74.825,26.95 74.825,27.77 75.405,28.35 79.325,28.35 79.905,27.77 P25.14@79.905,26.95 79.905,26.13 81.035,25 84.5,25 88.284,28.784 88.284,29.384 88.405,29.505 88.405,29.699 v2(88.434,29.728) ; P6.2@83.675,53.396 82.8,53.396 81.555,52.151 81.555,50.831 88.284,44.103 88.284,34.189 88.434,34.039 v2(88.434,33.969) ; P6.2@83.82,54.662 v1(83.82,55.881) P6.2@83.82,57.346 P17.4@83.82,59.691 ; v2(88.425,31) 90.975,31 93.713,28.262 93.713,27.237 P18.6@94,26.95 ; v1(116.322,27.163) 116.322,27.258 116.455,27.391 116.455,27.403 116.803,27.75 M1.6@117.975,27.75
  Mid-Layer 1 w0.15: v2(17.575,25.4) 17.6,25.375 17.995,25.375 18.475,25.855 18.475,27.225 v2(18.1,27.6) ; v2(88.434,29.728) v2(88.434,33.969)
  Mid-Layer 2 w0.15: v1(79.905,20.65) v1(79.905,26.05)
  Bottom Layer w0.15: J8.7@75.05,17.47 75.05,20.289 75.586,20.825 79.73,20.825 v1(79.905,20.65) ; v1(79.905,26.05) 80.955,27.1 99.463,27.1 101.963,24.6 102.356,24.6 105.353,21.603 111.403,21.603 112.4,22.6 112.4,23.774 112.466,23.84 112.466,24.132 114.252,25.919 114.545,25.919 115.827,27.201 116.285,27.201 v1(116.322,27.163) ; P12.2@83.82,54.416 P12.2@83.82,57.346
P0.23: J8.8 M1.8 P6.3 P12.3 P17.6 P25.16 | length 103.7
  Top Layer w0.15: P25.16@81.175,26.95 81.175,26.125 81.18,26.125 82.03,25.275 84.375,25.275 88.009,28.909 v2(88.009,29.728) ; P17.6@81.28,59.691 P6.3@81.28,57.346 v1(81.28,55.881) P6.3@81.28,54.416 81.28,50.717 88.009,43.989 v2(88.009,33.969) ; v1(116.643,26.627) 116.71,26.694 116.875,26.694 116.906,26.725 117.95,26.725 M1.8@117.975,26.75
  Mid-Layer 1 w0.15: v2(88.009,29.728) v2(88.009,33.969)
  Mid-Layer 2 w0.15: v1(81.175,20.923) ccw(c81.025,20.931) 81.175,20.931 v1(81.175,26.05)
  Bottom Layer w0.15: J8.8@73.95,17.47 73.95,19.578 75.472,21.1 81,21.1 81.161,20.939 cw(c81.055,20.833) v1(81.175,20.923) ; v1(81.175,26.05) 81.909,26.784 84.63,26.784 87.164,24.25 102.317,24.25 105.239,21.328 111.528,21.328 112.7,22.5 112.7,23.685 112.741,23.726 112.741,24.018 114.366,25.644 114.659,25.644 115.642,26.627 v1(116.643,26.627) ; P12.3@81.28,54.416 P12.3@81.28,57.346
P0.24: J8.1 M1.11 P6.4 P12.4 P17.8 P25.18 | length 94.9
  Top Layer w0.15: P6.4@78.6,53.396 79.76,53.396 81.005,52.151 81.005,50.603 87.734,43.875 87.734,34.189 87.584,34.039 v2(87.584,33.969) ; P6.4@78.74,54.416 P17.8@78.74,59.691 ; P25.18@82.445,26.95 82.445,26.13 P25.18@82.485,26.09 ; v1(82.454,26.059) P25.18@82.485,26.09 ; v2(87.584,29.728) 87.584,28.884 84.25,25.55 83.025,25.55 P25.18@82.485,26.09 ; v1(116.738,25.226) 116.741,25.229 117.954,25.229 M1.11@117.975,25.25
  Mid-Layer 1 w0.15: v2(87.584,29.728) v2(87.584,33.969)
  Mid-Layer 2 w0.15: v1(82.445,20.638) 82.445,26.05 v1(82.454,26.059)
  Bottom Layer w0.15: P12.4@78.74,54.416 P12.4@78.74,57.346 ; J8.1@81.65,17.47 81.65,17.91 81.1,18.46 81.1,19.763 cw(c81.25,19.763) 81.143,19.868 81.653,20.378 cw(c81.759,20.271) 81.658,20.383 ccw(c81.175,20.923) 81.715,20.439 cw(c81.826,20.339) 81.72,20.444 81.882,20.606 cw(c81.987,20.5) 81.987,20.65 82.386,20.65 cw(c82.385,20.5) v1(82.445,20.638) ; v1(82.454,26.059) 82.454,26.041 84.52,23.975 102.203,23.975 105.125,21.053 111.653,21.053 113.016,22.416 113.016,23.905 114.48,25.369 116.5,25.369 116.643,25.226 v1(116.738,25.226)
  other v1: 78.74,55.881
P0.25: J8.2 M1.12 P6.5 P12.5 P17.10 P25.20 | length 99.9
  Top Layer w0.15: P6.5@76.2,54.416 76.2,53.831 76.91,53.121 79.646,53.121 80.73,52.037 80.73,50.489 87.459,43.761 87.459,34.339 87.159,34.039 v2(87.159,33.969) ; P6.5@76.2,54.713 v1(76.2,55.881) P6.5@76.2,57.346 P17.10@76.2,59.691 ; v1(83.715,26.05) P25.20@83.715,26.95 85.25,26.95 87.159,28.859 v2(87.159,29.728) ; v1(116.737,24.584) 116.83,24.584 116.996,24.75 M1.12@117.975,24.75
  Mid-Layer 1 w0.15: v2(87.159,29.728) v2(87.159,33.969)
  Mid-Layer 2 w0.15: v1(83.715,20.863) v1(83.715,26.05)
  Bottom Layer w0.15: P12.5@76.2,54.416 P12.5@76.2,57.346 ; J8.2@80.55,17.47 80.825,17.745 80.825,19.876 cw(c80.975,19.876) 80.868,19.982 81.465,20.578 cw(c81.57,20.472) 81.47,20.583 ; 81.47,20.584 ccw(c81.175,20.923) 81.513,20.627 cw(c81.626,20.528) 81.519,20.633 81.93,21.044 cw(c82.036,20.938) 82.036,21.088 83.518,21.088 83.568,21.038 83.677,21.038 cw(c83.565,20.938) 83.715,20.938 v1(83.715,20.863) ; v1(83.715,26.05) 83.256,26.509 82.109,26.509 82.004,26.404 82.004,25.696 84,23.7 102.089,23.7 105.011,20.778 111.767,20.778 113.291,22.302 113.291,23.791 114.594,25.094 116.227,25.094 v1(116.737,24.584)
P0.26: M1.44 P6.6 P12.6 P17.12 SB3.1 | length 92
  Top Layer w0.15: SB3.1@73.66,49.338 SB3.1@73.66,49.35 P6.6@73.66,54.416 P6.6@73.66,57.346 P17.12@73.66,59.691 ; M1.44@129.225,22.25 129.914,22.25 130.164,22.5 v1(130.6,22.5)
  Bottom Layer w0.15: P12.6@73.66,57.346 v1(73.66,55.881) P12.6@73.66,54.416 73.66,53.831 74.424,53.067 90.479,53.067 91.36,52.186 103.079,52.186 109.54,45.725 111.575,45.725 122.867,34.433 128.003,34.433 132.1,30.337 132.1,27.189 131.825,26.914 131.825,23.636 130.689,22.5 v1(130.6,22.5)
P0.27: M1.45 P6.7 P12.7 P17.14 SB4.1 | length 93.7
  Top Layer w0.15: SB4.1@71.12,49.338 P6.7@71.12,54.416 P6.7@71.12,57.346 P17.14@71.12,59.691 ; M1.45@129.225,22.75 129.937,22.75 130.187,23 v1(130.2,23)
  Bottom Layer w0.15: P12.7@71.12,57.346 v1(71.12,55.881) P12.7@71.12,54.416 71.12,53.831 72.159,52.792 90.365,52.792 91.246,51.911 102.965,51.911 109.426,45.45 111.461,45.45 122.753,34.158 127.889,34.158 131.825,30.223 131.825,27.302 131.55,27.027 131.55,23.75 130.8,23 v1(130.2,23)
P0.28: M1.47 P6.8 P12.8 P17.16 SB7.1 | length 95
  Top Layer w0.15: SB7.1@68.58,49.338 SB7.1@68.58,49.35 P6.8@68.58,54.416 P6.8@68.58,57.346 P17.16@68.58,59.691 ; M1.47@129.225,23.75 130.355,23.75 130.505,23.6 v1(130.6,23.6)
  Bottom Layer w0.15: P12.8@68.58,57.346 v1(68.58,55.881) P12.8@68.58,54.416 68.58,53.831 69.894,52.517 90.251,52.517 91.132,51.636 102.851,51.636 109.312,45.175 111.347,45.175 122.639,33.883 127.775,33.883 131.55,30.109 131.55,27.416 131.275,27.141 131.275,24.275 v1(130.6,23.6)
P0.29: M1.48 P24.4 P27.4 SB8.1 | length 55.4
  Top Layer w0.15: v1(97.473,50.801) SB8.1@103.123,50.801 SB8.1@103.135,50.801 ; M1.48@129.225,24.25 129.275,24.2 v1(130.2,24.2)
  Bottom Layer w0.15: v1(97.473,50.801) 103.297,50.801 109.198,44.9 111.233,44.9 122.525,33.608 127.661,33.608 131.275,29.995 131.275,27.53 131,27.255 131,24.914 130.286,24.2 v1(130.2,24.2)
P0.30: M1.49 P4.9 P10.9 P16.18 U7_S4.15 U8_S7.4 | length 162.2
  Top Layer w0.15: P4.9@21.336,53.824 22.75,52.41 22.75,41.914 26.814,37.85 U7_S4.15@28.675,37.85 ; P4.9@21.336,54.416 v1(21.336,55.881) P4.9@21.336,57.346 P16.18@21.336,59.691 ; U8_S7.4@99.825,32.95 99.93,32.95 100.118,33.137 100.118,34.582 99.775,34.925 99.775,35.95 101.125,37.3 101.125,38.964 103.3,41.139 v1(103.3,41.8) ; M1.49@129.225,24.75 129.614,24.75 129.714,24.65 130.086,24.65 130.536,25.1 v1(130.55,25.1)
  Bottom Layer w0.15: P10.9@21.336,57.346 v1(21.336,55.881) P10.9@21.336,54.416 21.336,53.831 22.292,52.875 46.618,52.875 48.718,50.775 64.703,50.775 66.262,49.216 82.806,49.216 90.226,41.796 103.3,41.796 103.304,41.8 107.604,41.8 107.804,41.6 109.789,41.6 122.294,29.094 126.222,29.094 129.495,25.822 129.828,25.822 v1(130.55,25.1)
P0.31: M1.50 P4.10 P10.10 P16.20 U7_S4.3 U8_S7.8 | length 166
  Top Layer w0.15: P4.10@18.796,53.831 22.475,50.152 22.475,41.8 27.75,36.525 29.875,36.525 30.1,36.75 U7_S4.3@30.1,37.225 ; P4.10@18.796,54.416 v1(18.796,55.881) P4.10@18.796,57.346 P16.20@18.796,59.691 ; U8_S7.8@98.4,33.575 98.4,34.964 100.85,37.414 100.85,39.078 102.825,41.053 v1(102.825,41.325) ; M1.50@129.225,25.25 129.655,25.25 129.805,25.1 v1(129.9,25.1)
  Bottom Layer w0.15: P10.10@18.796,57.346 v1(18.796,55.881) P10.10@18.796,54.416 18.796,53.831 20.027,52.6 46.504,52.6 48.604,50.5 64.589,50.5 66.148,48.941 82.692,48.941 90.133,41.5 100.686,41.5 100.861,41.325 v1(102.825,41.325) 109.675,41.325 122.181,28.819 126.108,28.819 129.828,25.1 v1(129.9,25.1)
RESET: P18.10 P25.10 Q1.2 Q1.5 R9.1 R10.1 U7_S3.16 | length 123.1
  Top Layer w0.15: U7_S3.16@17.2,26.225 17.2,26.393 17.232,26.425 18.27,26.425 18.475,26.22 18.475,23.729 28.604,13.6 59.886,13.6 70.75,24.464 70.75,27.667 72.793,29.71 v2(77.365,29.71) 80.418,29.71 81.336,30.628 87.528,30.628 88.25,31.35 93.565,31.35 96.54,28.375 P18.10@96.54,26.95 96.845,26.645 96.845,25.386 98.775,23.456 98.775,20.776 103.351,16.2 107.615,16.2 108.7,15.115 R10.1@108.715,15.115 108.745,15.145 109.46,15.145 Q1.5@109.49,15.175 ; Q1.5@109.49,15.2 109.55,15.2 109.575,15.175 110.515,15.175 ; R9.1@110.53,16.5 110.515,16.485 110.515,15.417 110.515,15.2 111.015,15.2 Q1.2@111.04,15.175
  Mid-Layer 1 w0.15: v2(77.365,27.85) v2(77.365,29.71)
RESET_BOTTOM: P7.3 SB25.1 SB27.1 U7_S10.1 U7_S10.4 | length 58.8
  Top Layer w0.15: SB25.1@55.662,31.981 55.113,31.431 55.113,24.438 55.7,23.85 55.929,23.85 ; 56.264,23.85 U7_S10.1@57.675,23.85 58,23.85 58.2,23.65 58.2,22.922 57.928,22.65 U7_S10.4@57.675,22.65
  Bottom Layer w0.15: P7.3@33.02,6.156 33.02,5.571 34.311,4.28 34.311,3.717 35.166,2.861 46.632,2.861 48.875,5.104 48.875,14.062 50.788,15.975 54.892,15.975 57.2,18.283 57.2,23.55 v1(56.85,23.9)
  Bottom Layer w0.381: P7.3@33.02,6.156 P7.3@33.02,9.086
RESET_BUTTON: R23.1 SB21.2 SB24.2 SW5.2 U3.AL27 U7_S3.15 | length 85.7
  Top Layer w0.125: U7_S3.15@16.8,26.225 16.8,25.696 16.908,25.588 16.908,25.302 R23.1@16.96,25.25 16.96,25.235 17.237,24.958 17.237,24.14 17.29,24.087 17.29,23.807 17.237,23.755 17.237,22.463 17.4,22.3 17.983,22.3 24.838,15.445 24.838,15.362 25.2,15 25.2,14.567 v1(25.27,14.496) ; SW5.2@18.111,6 24.663,6 25.3,6.637 v1(25.3,9.1) ; U3.AL27@27.125,25.235 27.967,24.393 27.967,23.767 27.675,23.475 27.675,21.475 v1(27.475,21.275) ; v1(55.05,20.925) 55.05,20.285 55.91,19.425 57.013,19.425 57.5,19.912 SB24.2@59,19.912
  Bottom Layer w0.125: v1@25.27,14.496 25.27,20.27 26.1,21.1 27.2,21.1 27.375,21.275 v1(27.475,21.275) ; v1(25.27,14.496) 25.27,9.13 v1(25.3,9.1) 26.8,10.6 44.3,10.6 50.6,16.9 54.5,16.9 55.05,17.45 v1(55.05,20.925)
RESET_IN_CTRL: R73.2 U3.AD2 U7_S10.10 | length 52.2
  Top Layer w0.125: v2(21.2,24.925) 21.2,24.878 21.388,24.69 21.388,23.958 21.387,23.226 21.616,22.998 21.616,21.843 27.397,16.063 30.91,16.063 32.772,14.2 46.275,14.2 v2(46.925,14.85) ; v2(46.925,16.925) 47.106,16.925 53.381,23.2 55.66,23.2 R73.2@55.775,23.085 v2(56.225,23.085)
  Top Layer w0.15: v2(58.625,23.05) U7_S10.10@59.325,23.05
  Mid-Layer 1 w0.125: v2(21.2,24.925) 21.2,25.062 21.885,25.747 22.259,25.747 22.437,25.925 22.437,26.588 22.167,26.859 v2(22.125,26.859) ; v2(46.925,14.85) v2(46.925,16.925)
  Mid-Layer 1 w0.15: v2(56.225,23.085) 56.61,22.7 58.275,22.7 v2(58.625,23.05)
RESET_OUT_CTRL: R72.1 U3.AH2 U7_S10.2 | length 51
  Top Layer w0.125: v2(21.075,24.5) 21.075,23.185 21.366,22.894 21.366,21.74 27.293,15.813 30.806,15.813 32.669,13.95 46.7,13.95 v2(47.275,14.525) ; v2(47.075,17.375) 47.202,17.375 53.277,23.45 56.681,23.45 ; R72.1@56.7,23.085 56.7,23.432 56.681,23.45 ; U7_S10.2@57.675,23.45 56.681,23.45
  Mid-Layer 1 w0.125: v2(21.075,24.5) 20.862,24.713 20.862,25.078 21.844,26.059 v2(22.125,26.059) ; v2(47.075,17.375) 47.263,17.188 47.263,14.538 v2(47.275,14.525)
RESET_P5_BOTTOM: P11.5 SB25.2 SB26.2 | length 7.4
  Top Layer w0.15: 56,30.793 56.143,30.793 v1(56.6,31.25) 56.6,31.719 SB25.2@56.338,31.981
  Bottom Layer w0.15: v1(56.6,31.25) 57.369,30.481 P11.5@62.072,30.481
RESET_P5_TOP: P5.5 SB26.1 SB28.2 | length 8.1
  Top Layer w0.15: 55.853,30.169 56.353,30.169 ; SB28.2@56.338,28.981 56.338,30.153 56.353,30.169 ; v2(59.794,30.481) 56.869,30.481 56.557,30.169 56.353,30.169 ; v2(61.006,30.481) P5.5@62.357,30.481 P5.5@62.675,30.481
  Mid-Layer 1 w0.15: v2(59.794,30.481) v2(61.006,30.481)
RESET_TOP: P1.3 P13.6 SB27.2 SB28.1 U7_S10.16 | length 56.3
  Top Layer w0.15: SB28.1@55.662,28.981 55.4,28.719 55.4,24.67 55.595,24.475 56,24.475 U7_S10.16@57.9,24.475
  Top Layer w0.75: P13.6@33.02,3.811 P1.3@33.02,6.156 P1.3@33.02,9.086
  Bottom Layer w0.15: P13.6@33.02,3.811 34.436,2.395 46.934,2.395 49.15,4.611 49.15,13.948 50.889,15.687 55.187,15.687 57.725,18.225 57.725,23.661 56.861,24.525 v1(56.825,24.525)
SCL_EXT: R49.1 U5.12 U8_S7.7 | length 5.4
  Top Layer w0.15: U8_S7.7@98.8,33.575 98.8,33.1 v2(99.15,32.75) ; v2(100.625,32.55) 100.625,32.123 100.998,31.75 U5.12@102.585,31.75 ; R49.1@101.118,31.385 101.118,31.747
  Mid-Layer 1 w0.15: v2(99.15,32.75) 100.425,32.75 v2(100.625,32.55)
SDA_EXT: R48.1 U5.13 U8_S7.3 | length 4.5
  Top Layer w0.15: U8_S7.3@99.825,32.55 100.078,32.55 100.35,32.278 100.35,31.557 100.917,30.99 101.124,30.99 ; R48.1@101.118,30.572 101.118,30.984 101.124,30.99 ; U5.13@102.81,31.018 102.781,30.99 101.124,30.99
SHIELD_DETECT: R69.1 SB18.2 U3.AE31 | length 42.2
  Top Layer w0.125: U3.AE31@28.125,26.659 28.631,26.659 28.94,26.35 32.875,26.35 v2(33.804,25.421) ; v1(65.385,29.465) R69.1@65.385,28.55 65.862,28.55 SB18.2@66.662,27.75
  Mid-Layer 1 w0.125: v2(33.804,25.421) 37.621,25.421 41.35,29.15 v1(53.1,29.15)
  Bottom Layer w0.125: v1(53.1,29.15) 53.733,29.784 65.067,29.784 v1(65.385,29.465)
SIM_1V8: M1.19 P30.2 SB12.1 | length 20.5
  Top Layer w0.25: P30.2@107.27,11.8 112.058,11.8 112.958,12.7 115.397,12.7 116.8,14.103 v3(116.8,17.3) ; v3(117.7,18.4) 117.4,18.7 117.4,21.104 117.546,21.25 M1.19@117.975,21.25
  Top Layer w0.254: 106.24,13.945 106.762,13.422 P30.2@106.762,12.308
  Mid-Layer 1 w0.25: v3(116.8,17.3) 117.69,18.19 117.69,18.39 v3(117.7,18.4)
SIM_CLK: M1.18 P28.5 U8_S9.4 | length 49
  Top Layer w0.203: U8_S9.4@87.275,17.45 87.252,17.427 86.994,17.427 86.773,17.206 86.773,16.852 87.498,16.127 92.998,16.127 94.197,14.928 94.197,13.97 94.941,13.227 97.398,13.227 P28.5@98,12.625 ; P28.5@98,11.8 P28.5@98,12.625 ; M1.18@117.975,21.75 117.45,21.75 117,21.3 117,18.328 117.8,17.528 117.8,14.141 115.679,12.02 113.24,12.02 110.238,9.019 103.953,9.019 102.394,10.578 102.394,12.356 101.523,13.227 98.552,13.227 98,12.675 P28.5@98,12.625